# EAGLE board v1 (EAGLE 9.6.2)
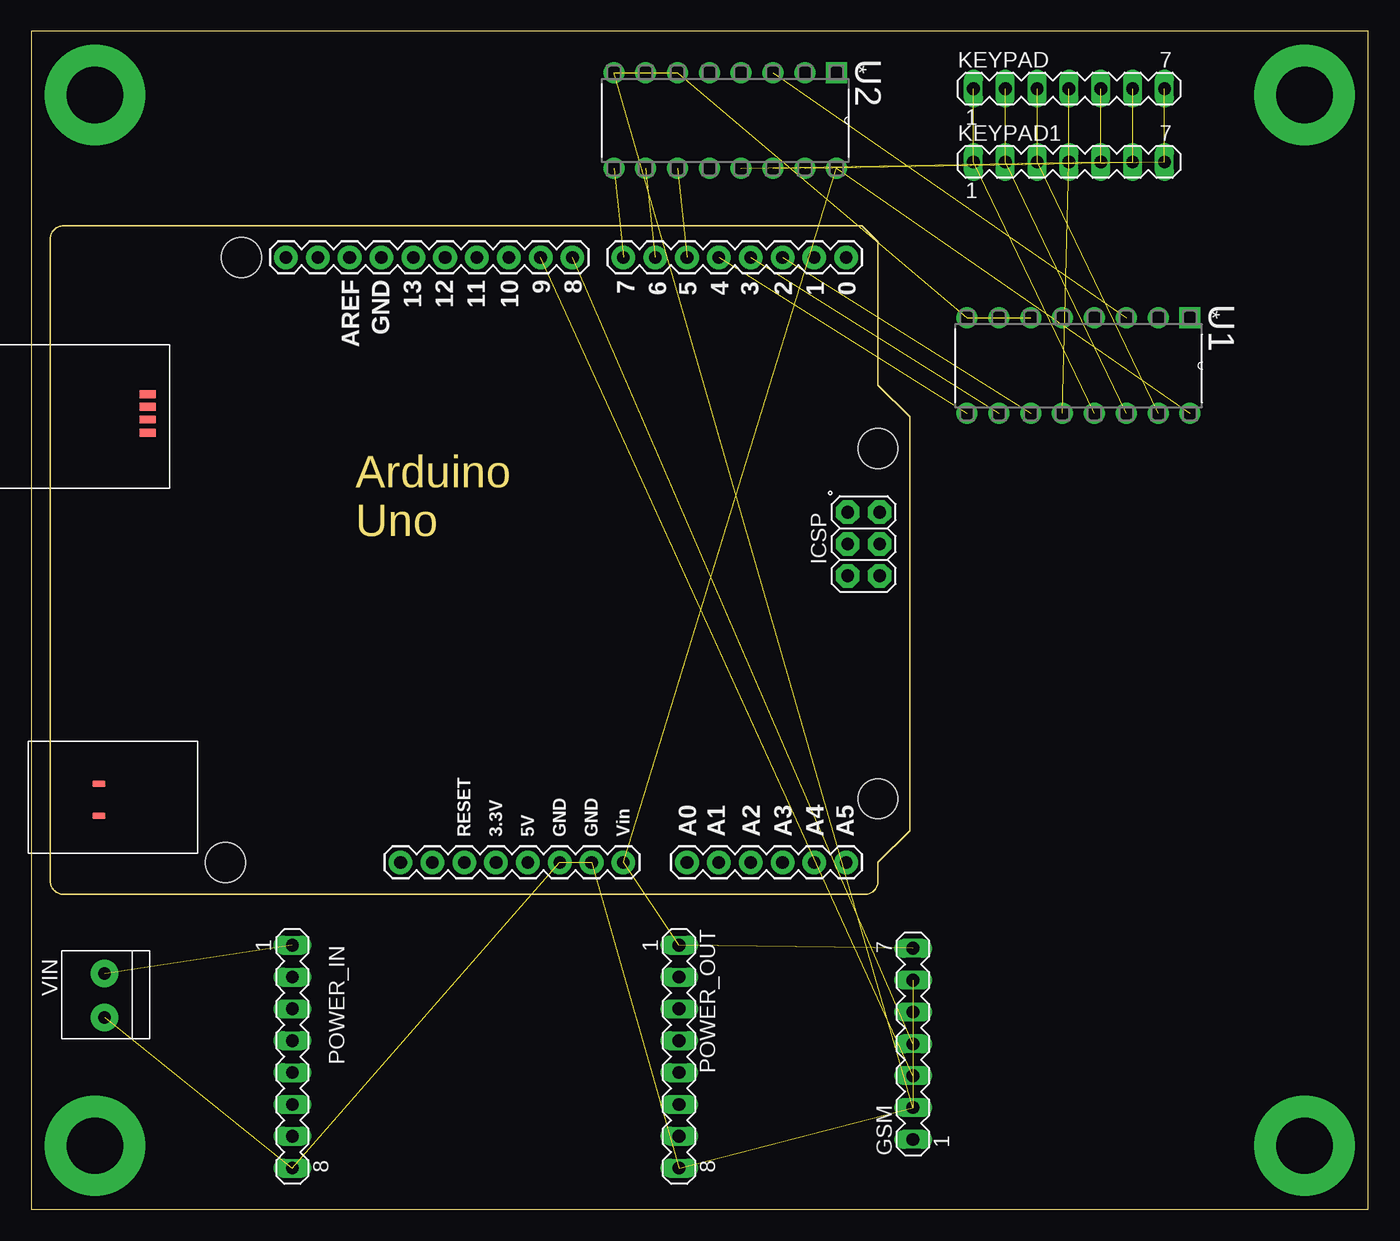
[diagram p0: board, top side]

Size 106.68 x 93.98 mm. Coordinates in mm from the lower left corner, seen from the top.
Outline: 0,0 106.68,0 106.68,93.98 0,93.98 0,0
Copper layers (1*16): Top 0.035mm / dielectric 1.5mm / Bottom 0.035mm
Design rules "default *": minimum track width 8mil, minimum drill 0.35mm, track to track 8mil, track to pad 8mil, pad to pad 8mil, via to via 8mil, smd to smd 8mil, copper to edge 40mil, drill to drill 6mil, minimum pad ring 10mil, minimum via ring 8mil, stop-mask expansion 4mil, vias tented up to drill 0mil, thermal gap 10mil
Net classes: 0 default: width 0.203 mm, drill 0.203 mm, clearance 0.203 mm; 1 Power: width 0.305 mm, drill 0.305 mm, clearance 0.305 mm

## Footprints (pad centres in the part's own frame; a part is rotated, then mirrored left to right if it is on the bottom)
MA07-1 = drill 1.016 long: 1 -7.62,0; 2 -5.08,0; 3 -2.54,0; 4 0,0; 5 2.54,0; 6 5.08,0; 7 7.62,0
ARDUINO_UNO = drill 1.016 pad 1.88: 0 63.5,50.8; 1 60.96,50.8; 2 58.42,50.8; 3 55.88,50.8; 3.3V 35.56,2.54; 4 53.34,50.8; 5 50.8,50.8; 5V 38.1,2.54; 6 48.26,50.8; 7 45.72,50.8; 8 41.656,50.8; 9 39.116,50.8; 10 36.576,50.8; 11 34.036,50.8; 12 31.496,50.8; 13 28.956,50.8; A0 50.8,2.54; A1 53.34,2.54; A2 55.88,2.54; A3 58.42,2.54; A4 60.96,2.54; A5 63.5,2.54; AREF 23.876,50.8; GND 26.416,50.8; GND. 43.18,2.54; GND.. 40.64,2.54; I/OREF 30.48,2.54; N/C 27.94,2.54; RESET 33.02,2.54; SCL 18.796,50.8; SDA 21.336,50.8; VIN 45.72,2.54 | drill 1.016 pad 1.88 octagon: +5V 66.167,30.48; GND_ 66.167,25.4; MISO 63.627,30.48; MOSI 66.167,27.94; RESET. 63.627,25.4; SCK 63.627,27.94 | smd 1.016 x 0.508: <PWR>+V 3.861,8.814; <PWR>-V 3.861,6.274 | smd 1.27 x 0.635: <USB>+V 7.772,39.878; <USB>D+ 7.772,38.887; <USB>D- 7.772,37.871; <USB>GND 7.772,36.83 | hole 3.2: 66.04,7.62; 66.04,35.56; 15.24,50.8; 13.97,2.54
MA08-1 = drill 1.016 long: 1 -8.89,0; 2 -6.35,0; 3 -3.81,0; 4 -1.27,0; 5 1.27,0; 6 3.81,0; 7 6.35,0; 8 8.89,0
DIP254P762X508-16 = drill 1.118 square: 1 -7.62,17.78 | drill 1.118: 2 -7.62,15.24; 3 -7.62,12.7; 4 -7.62,10.16; 5 -7.62,7.62; 6 -7.62,5.08; 7 -7.62,2.54; 8 -7.62,0; 9 0,0; 10 0,2.54; 11 0,5.08; 12 0,7.62; 13 0,10.16; 14 0,12.7; 15 0,15.24; 16 0,17.78
1X2-3.5MM = drill 1 pad 2.184: 1 1.8,0; 2 -1.7,0

## Placement (x,y rotation side)
GSM  [MA07-1]  70.36,13.21 90 top
KEYPAD  [MA07-1]  82.8,89.41 0 top
KEYPAD1  [MA07-1]  82.8,83.57 0 top
PCB1  ARDUINO_UNO  [ARDUINO_UNO]  1.52,25.15 0 top
POWER_IN  [MA08-1]  20.83,12.19 270 top
POWER_OUT  [MA08-1]  51.69,12.19 270 top
U1  CD4051BE  [DIP254P762X508-16]  74.68,63.5 270 top
U2  CD4051BE  [DIP254P762X508-16]  46.48,83.06 270 top
VIN  1X2-3.5MM  [1X2-3.5MM]  5.84,17.02 90 top

## Library data of the parts
GSM KEYPAD KEYPAD1 POWER_IN POWER_OUT = con-lstb; OC_FARNELL: unknown; OC_NEWARK: unknown
PCB1 = E14_Arduino_revC
U1 U2 = Texas Instruments_By_element14_Batch_1; MPN: CD4051BE; OC_FARNELL: 1106109; OC_NEWARK: 60K5119; PACKAGE: PDIP-16; SUPPLIER: Texas Instruments
VIN = adafruit

## Nets
2: PCB1.2 U1.11
3: PCB1.3 U1.10
4: PCB1.4 U1.9
5: PCB1.5 U2.11
6: PCB1.6 U2.10
7: PCB1.7 U2.9
12V [Power]: POWER_IN.1 VIN.1
COL1: KEYPAD1.5 KEYPAD.5 U2.13
COL2: KEYPAD1.6 KEYPAD.6 U2.14
COL3: KEYPAD1.7 KEYPAD.7 U2.15
COM: U1.3 U2.3
GND [Power]: GSM.2 GSM.6 PCB1.GND. PCB1.GND.. POWER_IN.8 POWER_OUT.8 U1.6 U1.7 U1.8 U2.6 U2.7 U2.8 VIN.2
ROW1: KEYPAD1.1 KEYPAD.1 U1.13
ROW2: KEYPAD1.2 KEYPAD.2 U1.14
ROW3: KEYPAD1.3 KEYPAD.3 U1.15
ROW4: KEYPAD1.4 KEYPAD.4 U1.12
RX: GSM.3 PCB1.9
TX: GSM.4 PCB1.8
VCC [Power]: GSM.7 PCB1.VIN POWER_OUT.1 U1.16 U2.16

## Tracks (layer width: path | path; a pad name or v marks a point on that pad's centre or on a via)
2  (1 unrouted)
3  (1 unrouted)
4  (1 unrouted)
5  (1 unrouted)
6  (1 unrouted)
7  (1 unrouted)
12V  (1 unrouted)
COL1  (2 unrouted)
COL2  (2 unrouted)
COL3  (2 unrouted)
COM  (1 unrouted)
GND  (12 unrouted)
N$1  (via drill 4.5 pad 8)
  other vias: 5.08,5.08
N$2  (via drill 4.5 pad 8)
  other vias: 5.08,88.9
N$3  (via drill 4.5 pad 8)
  other vias: 101.6,88.9
N$4  (via drill 4.5 pad 8)
  other vias: 101.6,5.08
ROW1  (2 unrouted)
ROW2  (2 unrouted)
ROW3  (2 unrouted)
ROW4  (2 unrouted)
RX  (1 unrouted)
TX  (1 unrouted)
VCC  (4 unrouted)